# Allegro board divider_v1.brd
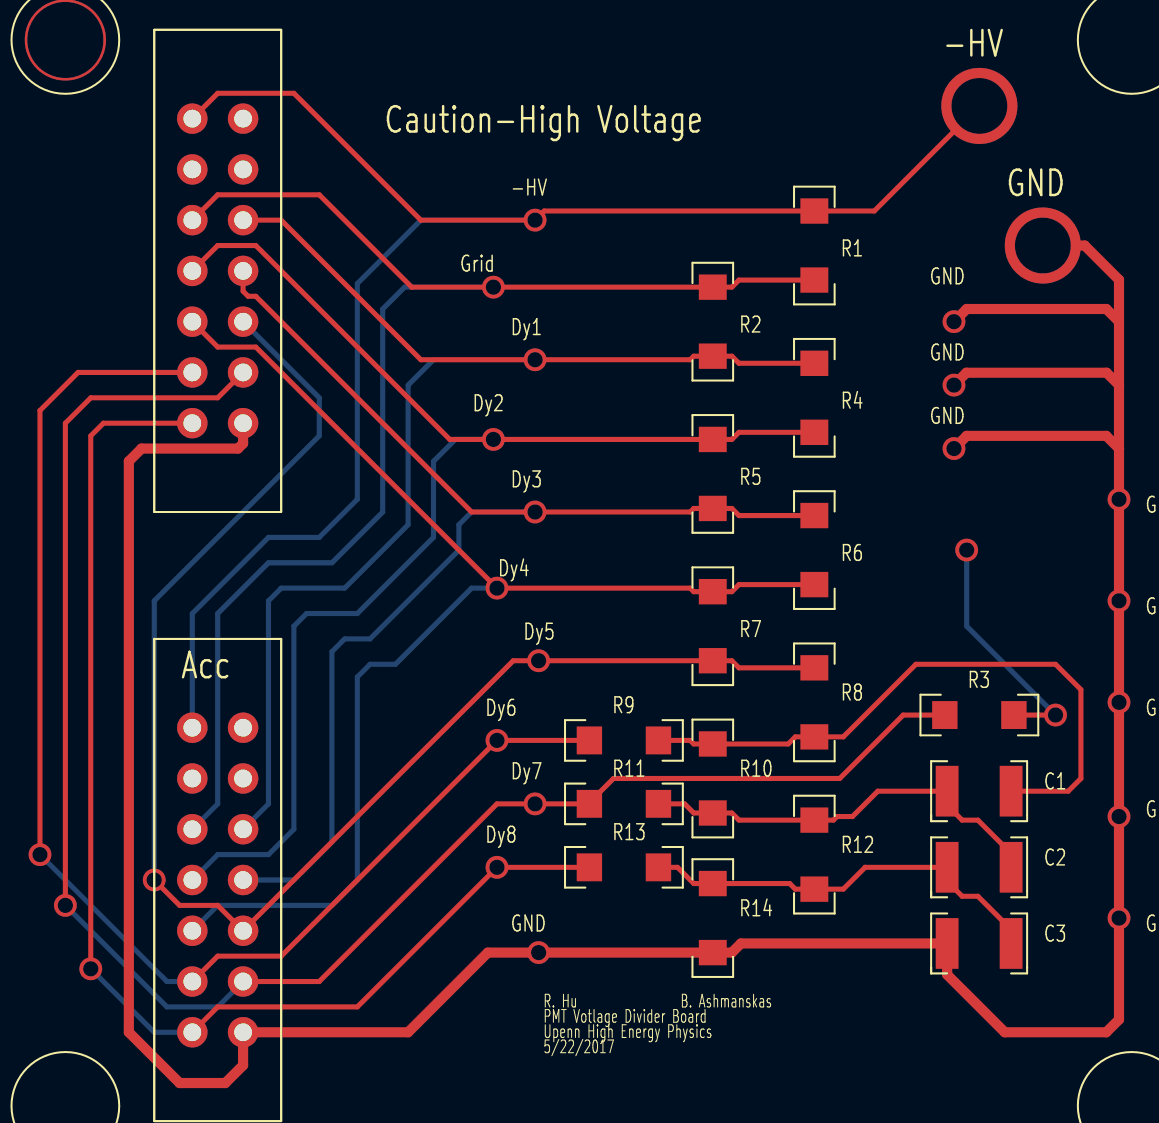
[diagram p0: board, top side]
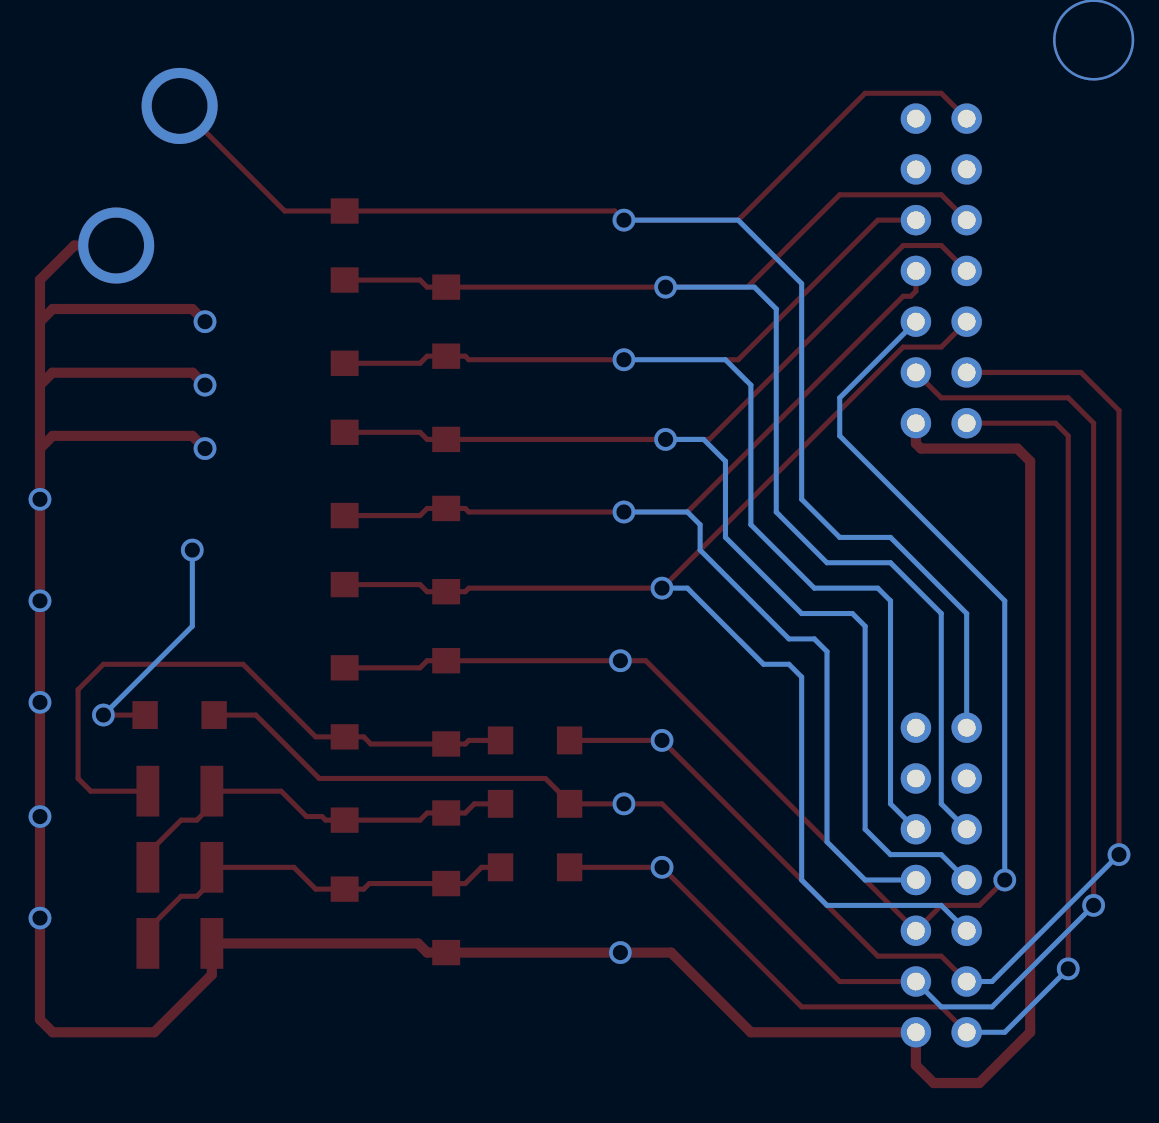
[diagram p1: board, bottom side, seen from below]

No outline. copper layers: TOP, BOTTOM. Coordinates in mm from the lowest, leftmost part position.

## Placement (name value [footprint] x y rotation side)
JT1  -  [HDR14]  0 33.66 0 top
JT2  -  [HDR14]  0 3.17 0 top
RT1  390K  [R1206]  29.84 34.92 270 top
RT2  1.44M  [R1206]  24.77 31.11 270 top
RT3  450K  [R1206]  29.84 27.3 270 top
RT4  450K  [R1206]  24.77 23.49 270 top
RT5  300K  [R1206]  29.84 19.69 270 top
RT6  300K  [R1206]  24.77 15.87 270 top
RT7  300K  [R1206]  29.84 12.06 270 top
RT8  1M  [R1206]  38.1 11.43 180 top
RT9  51  [R1206]  20.32 10.16 180 top
RT10  300K  [R1206]  24.77 8.26 270 top
RT11  0.022UF  [C1210]  38.1 7.62 180 top
RT12  51  [R1206]  20.32 6.98 180 top
RT13  300K  [R1206]  29.84 4.44 270 top
RT14  51  [R1206]  20.32 3.81 180 top
RT15  0.022UF  [C1210]  38.1 3.81 180 top
RT16  300K  [R1206]  24.77 1.27 270 top
RT17  0.022UF  [C1210]  38.1 0 180 top

## Library data of the parts
JT1 JT2 = CONN14
RT1 = RSMD1206: part number: RSMD1206-390K,5%,1206
RT2 = RSMD1206: part number: RSMD1206-1.44M,5%,1206
RT3 RT4 = RSMD1206: part number: RSMD1206-450K,5%,1206
RT5-RT7 RT10 RT13 RT16 = RSMD1206: part number: RSMD1206-300K,5%,1206
RT8 = RSMD1206: part number: RSMD1206-1M,5%,1206
RT9 RT12 RT14 = RSMD1206: part number: RSMD1206-51,5%,1206
RT11 RT15 RT17 = CSMD1210: alternate symbols: (C1206); part number: CSMD1210-0.022UF,20%,1210,2KV

## Footprints (pads in the part's own frame, mm; a bottom-side part is the same pattern mirrored in y, then rotated)
C1210
  rect 1.143x2.54 smd: 1(-1.587,0) 2(1.612,0)
HDR14
  round 1.524 hole 0.889: 1(-1.27,7.62) 2(1.27,7.62) 3(-1.27,5.08) 4(1.27,5.08) 5(-1.27,2.54) 6(1.27,2.54) 7(-1.27,0) 8(1.27,0) 9(-1.27,-2.54) 10(1.27,-2.54) 11(-1.27,-5.08) 12(1.27,-5.08) 13(-1.27,-7.62) 14(1.27,-7.62)
R1206
  rect 1.27x1.397 smd: 1(-1.727,0) 2(1.727,0)

## Nets
GND: JT1.14 JT2.14 RT16.2(B<0>) RT17.2(B<0>)
-HV: JT1.1 JT2.1 RT1.1(A<0>)
ACC: RT8.1(A<0>)
UNNAMED_1_CONN14_I18_5: JT1.5 JT2.5 RT1.2(B<0>) RT2.1(A<0>)
UNNAMED_1_CONN14_I18_6: JT1.6 JT2.6 RT2.2(B<0>) RT3.1(A<0>)
UNNAMED_1_CONN14_I18_7: JT1.7 JT2.7 RT3.2(B<0>) RT4.1(A<0>)
UNNAMED_1_CONN14_I18_8: JT1.8 JT2.8 RT4.2(B<0>) RT5.1(A<0>)
UNNAMED_1_CONN14_I18_9: JT1.9 JT2.9 RT5.2(B<0>) RT6.1(A<0>)
UNNAMED_1_CONN14_I18_10: JT1.10 JT2.10 RT6.2(B<0>) RT7.1(A<0>)
UNNAMED_1_CONN14_I18_11: JT1.11 JT2.11 RT9.2(B<0>)
UNNAMED_1_CONN14_I18_12: JT1.12 JT2.12 RT8.2(B<0>) RT12.2(B<0>)
UNNAMED_1_CONN14_I18_13: JT1.13 JT2.13 RT14.2(B<0>)
UNNAMED_1_CSMD1210_I15_A: RT7.2(B<0>) RT9.1(A<0>) RT10.1(A<0>) RT11.1(A<0>)
UNNAMED_1_CSMD1210_I15_B: RT10.2(B<0>) RT11.2(B<0>) RT12.1(A<0>) RT13.1(A<0>) RT15.1(A<0>)
UNNAMED_1_CSMD1210_I16_A: RT13.2(B<0>) RT14.1(A<0>) RT15.2(B<0>) RT16.1(A<0>) RT17.1(A<0>)

Pads without a net: JT1 2 3 4; JT2 2 3 4

## Via types
v1: diameter 1.143, hole 0.762, TOP to BOTTOM, 25 vias
v2: diameter 3.81, hole 2.794, TOP to BOTTOM, 2 vias
v3: diameter 4.064, hole 3.81, TOP to BOTTOM, 1 via

## Routing (per net, layer and track width the routed paths; a pad name or vN(x,y) marks a point on that pad's centre or on a via; arc(x,y) is an arc through that point)
GND: length 161
  TOP w0.508: v1(36.83,24.77) 37.47,25.4 44.45,25.4 45.09,24.77 ; 45.09,31.11 44.45,31.75 37.47,31.75 v1(36.83,31.11) ; 45.09,31.11 45.09,27.94 ; 45.09,31.11 45.09,33.21 43.37,34.92 v2(41.27,34.92) ; 45.09,24.77 v1(45.09,22.22) v1(45.09,17.14) v1(45.09,12.06) v1(45.09,6.35) v1(45.09,1.27) 45.09,-3.81 44.45,-4.45 39.37,-4.45 36.49,-1.56 RT17.2 26.17,0 25.72,-0.46 RT16.2 v1(16.05,-0.46) 13.51,-0.46 9.52,-4.45 JT2.14 1.27,-6.1 0.38,-6.99 -1.9,-6.99 -4.44,-4.45 -4.44,24.13 -3.81,24.77 1.02,24.77 1.27,25.02 1.27,26.03 ; 45.09,24.77 45.09,27.94 ; 45.09,27.94 44.47,28.56 37.45,28.56 v1(36.83,27.94)
-HV: length 82.2
  TOP w0.254: v2(38.1,41.91) 32.84,36.65 RT1.1 16.33,36.65 v1(15.88,36.2) 10.16,36.2 3.81,42.54 0,42.54 JT1.1
  BOTTOM w0.254: JT2.1 -1.27,16.51 2.54,20.32 5.08,20.32 6.98,22.22 6.98,33.02 10.16,36.2 v1(15.88,36.2)
  vias: v3(-7.62,45.21)
ACC: length 12.2
  TOP w0.254: RT8.1 v1(41.91,11.43)
  BOTTOM w0.254: v1(41.91,11.43) 37.47,15.87 v1(37.47,19.69)
UNNAMED_1_CONN14_I18_5: length 71.5
  TOP w0.254: RT1.2 26.07,33.2 25.72,32.84 RT2.1 v1(13.79,32.84) 9.7,32.84 5.08,37.46 0,37.46 JT1.5
  BOTTOM w0.254: v1(13.79,32.84) 9.35,32.84 8.25,31.75 8.25,21.59 5.71,19.05 2.54,19.05 0,16.51 0,6.98 JT2.5
UNNAMED_1_CONN14_I18_6: length 66.1
  TOP w0.254: JT1.6 3.18,36.2 10.16,29.21 v1(15.88,29.21) 23.63,29.21 23.81,29.39 RT2.2 25.72,29.39 26.07,29.03 RT3.1
  BOTTOM w0.254: v1(15.88,29.21) 10.8,29.21 9.52,27.94 9.52,20.95 6.35,17.78 3.18,17.78 2.54,17.14 2.54,6.98 JT2.6
UNNAMED_1_CONN14_I18_7: length 68.2
  TOP w0.254: RT3.2 26.07,25.58 25.72,25.22 RT4.1 v1(13.79,25.22) 11.61,25.22 1.91,34.92 0,34.92 JT1.7
  BOTTOM w0.254: JT2.7 0,4.44 2.54,4.44 3.81,5.71 3.81,15.87 4.45,16.51 6.98,16.51 10.8,20.32 10.8,24.13 11.89,25.22 v1(13.79,25.22)
UNNAMED_1_CONN14_I18_8: length 62.9
  TOP w0.254: RT5.1 26.07,21.41 25.72,21.77 RT4.2 23.81,21.77 23.63,21.59 v1(15.88,21.59) 12.7,21.59 1.91,32.38 1.52,32.38 1.27,32.64 JT1.8
  BOTTOM w0.254: JT2.8 3.81,3.17 5.71,5.08 5.71,14.6 6.35,15.24 7.62,15.24 12.07,19.69 12.07,20.95 12.7,21.59 v1(15.88,21.59)
UNNAMED_1_CONN14_I18_9: length 65.2
  TOP w0.254: RT5.2 26.07,17.96 25.72,17.6 RT6.1 23.81,17.6 23.63,17.78 v1(13.97,17.78) 1.91,29.84 0,29.84 -1.27,31.11
  BOTTOM w0.254: JT2.9 0,1.9 5.71,1.9 6.98,3.17 6.98,13.33 7.62,13.97 8.89,13.97 12.7,17.78 v1(13.97,17.78)
UNNAMED_1_CONN14_I18_10: length 72.8
  TOP w0.254: RT7.1 26.07,13.79 25.72,14.15 RT6.2 v1(16.05,14.15) 14.78,14.15 JT2.10 0,1.9 -1.9,1.9 v1(-3.17,3.17)
  BOTTOM w0.254: v1(-3.17,3.17) -3.17,17.14 5.08,25.4 5.08,27.3 1.27,31.11
UNNAMED_1_CONN14_I18_11: length 65.7
  TOP w0.254: -1.27,28.57 -6.98,28.57 -8.89,26.67 v1(-8.89,4.44) ; JT2.11 0,-0.63 3.18,-0.63 v1(13.97,10.16) RT9.2
  BOTTOM w0.254: JT2.11 -2.54,-1.91 v1(-8.89,4.44)
UNNAMED_1_CONN14_I18_12: length 86.3
  TOP w0.254: RT8.2 34.29,11.43 31.12,8.26 19.8,8.26 18.59,7.05 RT12.2 v1(15.88,6.98) 13.97,6.98 5.08,-1.91 JT2.12 ; v1(-7.62,1.9) -7.62,26.03 -6.35,27.3 0,27.3 1.27,28.57
  BOTTOM w0.254: v1(-7.62,1.9) -2.54,-3.18 0,-3.18 JT2.12
UNNAMED_1_CONN14_I18_13: length 61.7
  TOP w0.254: v1(-6.35,-1.27) -6.35,25.4 -5.71,26.03 -1.27,26.03 ; RT14.2 v1(13.97,3.81) 6.98,-3.18 0,-3.18 JT2.13
  BOTTOM w0.254: JT2.13 -3.17,-4.45 v1(-6.35,-1.27)
UNNAMED_1_CSMD1210_I15_A: length 31.6
  TOP w0.254: RT11.1 42.55,7.62 43.18,8.26 43.18,12.7 41.91,13.97 34.92,13.97 31.29,10.34 RT7.2 28.89,10.34 28.54,9.98 RT10.1 23.81,9.98 23.63,10.16 RT9.1
UNNAMED_1_CSMD1210_I15_B: length 21
  TOP w0.254: RT12.1 23.36,6.98 23.81,6.53 RT10.2 25.72,6.53 26.07,6.17 RT13.1 30.8,6.17 30.98,6.35 31.75,6.35 33.02,7.62 RT11.2 36.49,6.92 37.24,6.17 38.03,6.17 39.69,4.51 RT15.1
UNNAMED_1_CSMD1210_I16_A: length 20.9
  TOP w0.254: RT17.1 39.69,0.7 38.03,2.36 37.24,2.36 36.49,3.11 RT15.2 32.38,3.81 31.29,2.72 RT13.2 28.89,2.72 28.61,3 RT16.1 23.81,3 23,3.81 RT14.1

## Text on the board
Ref Des/Silkscreen Top: R. Hu | PMT Votlage Divider Board | Upenn High Energy Physics | 5/22/2017 | B. Ashmanskas | Grid | Dy2 | Dy6 | Dy8 | Dy4 | -HV | Dy1 | Dy3 | Dy7 | GND | Dy5 | R9 | R11 | R13 | R2 | R5 | R7 | R10 | R14 | R1 | R4 | R6 | R8 | R12 | R3 | C1 | C2 | C3 | Acc | Caution-High Voltage
